# EAGLE board i2cRelay (EAGLE 9.2.2)
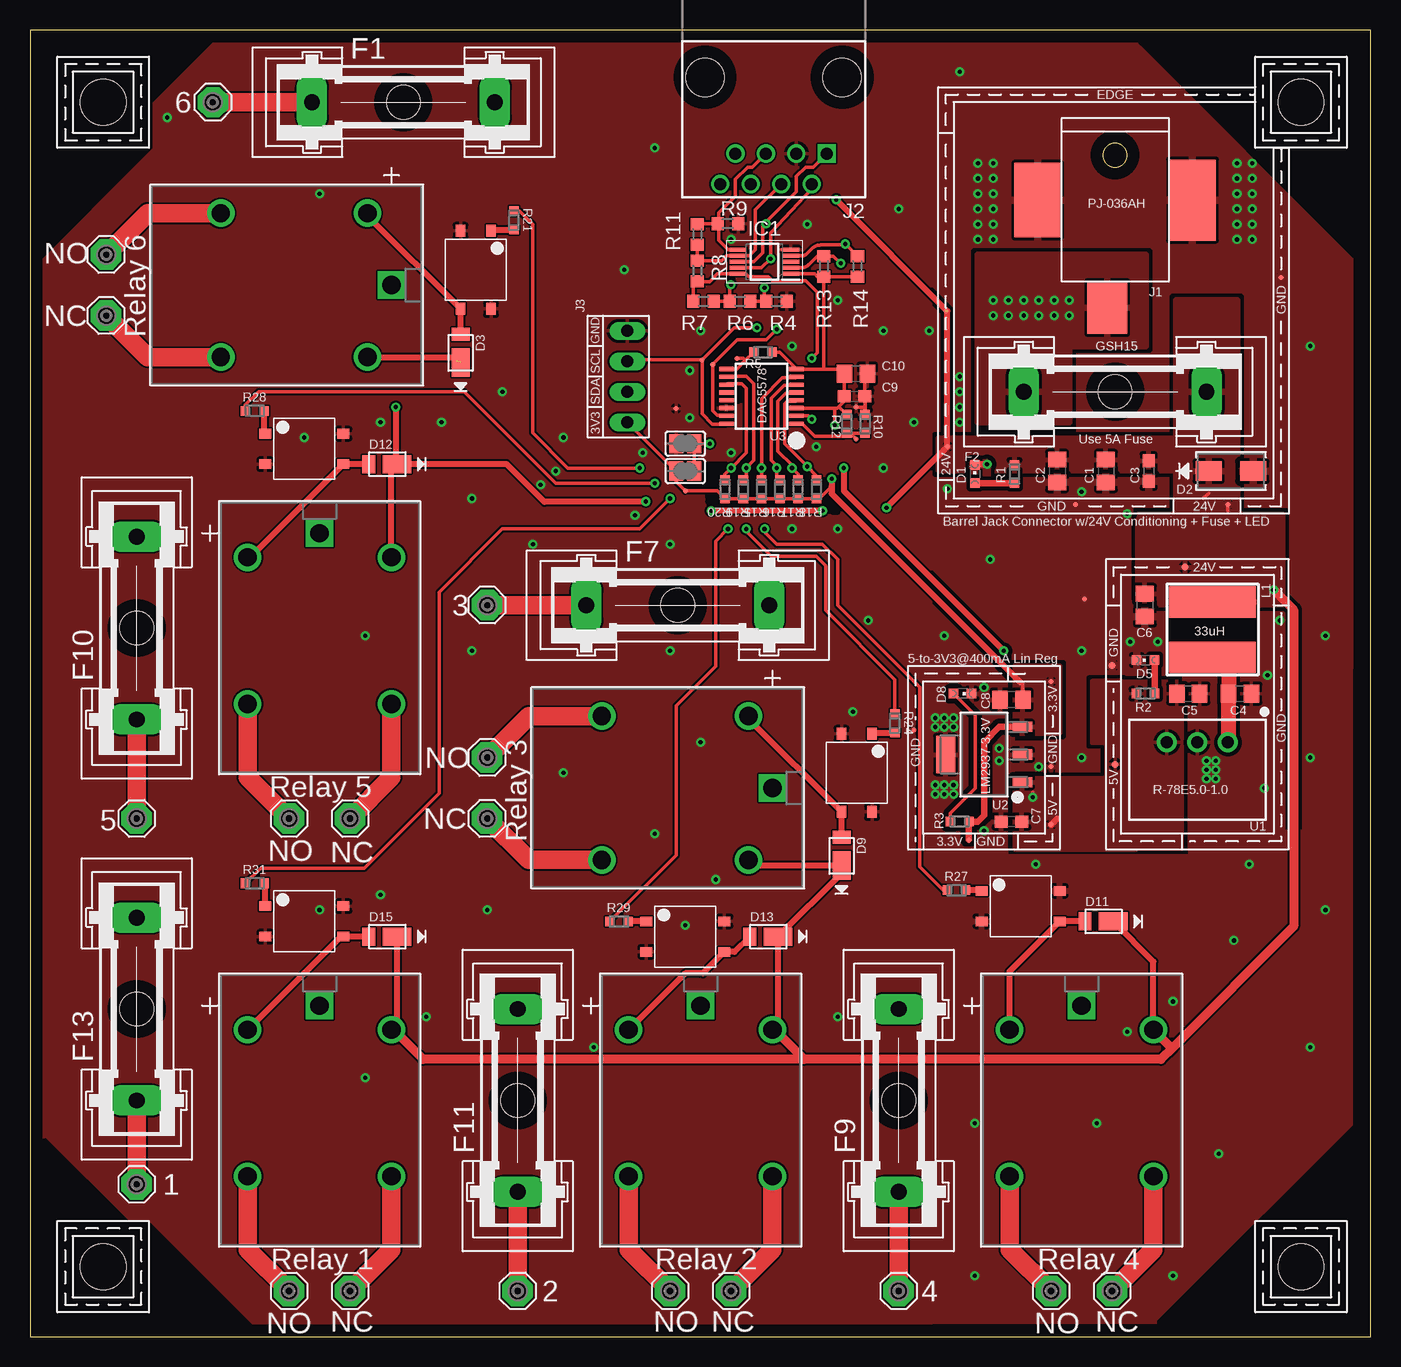
[diagram p0: board, top side]
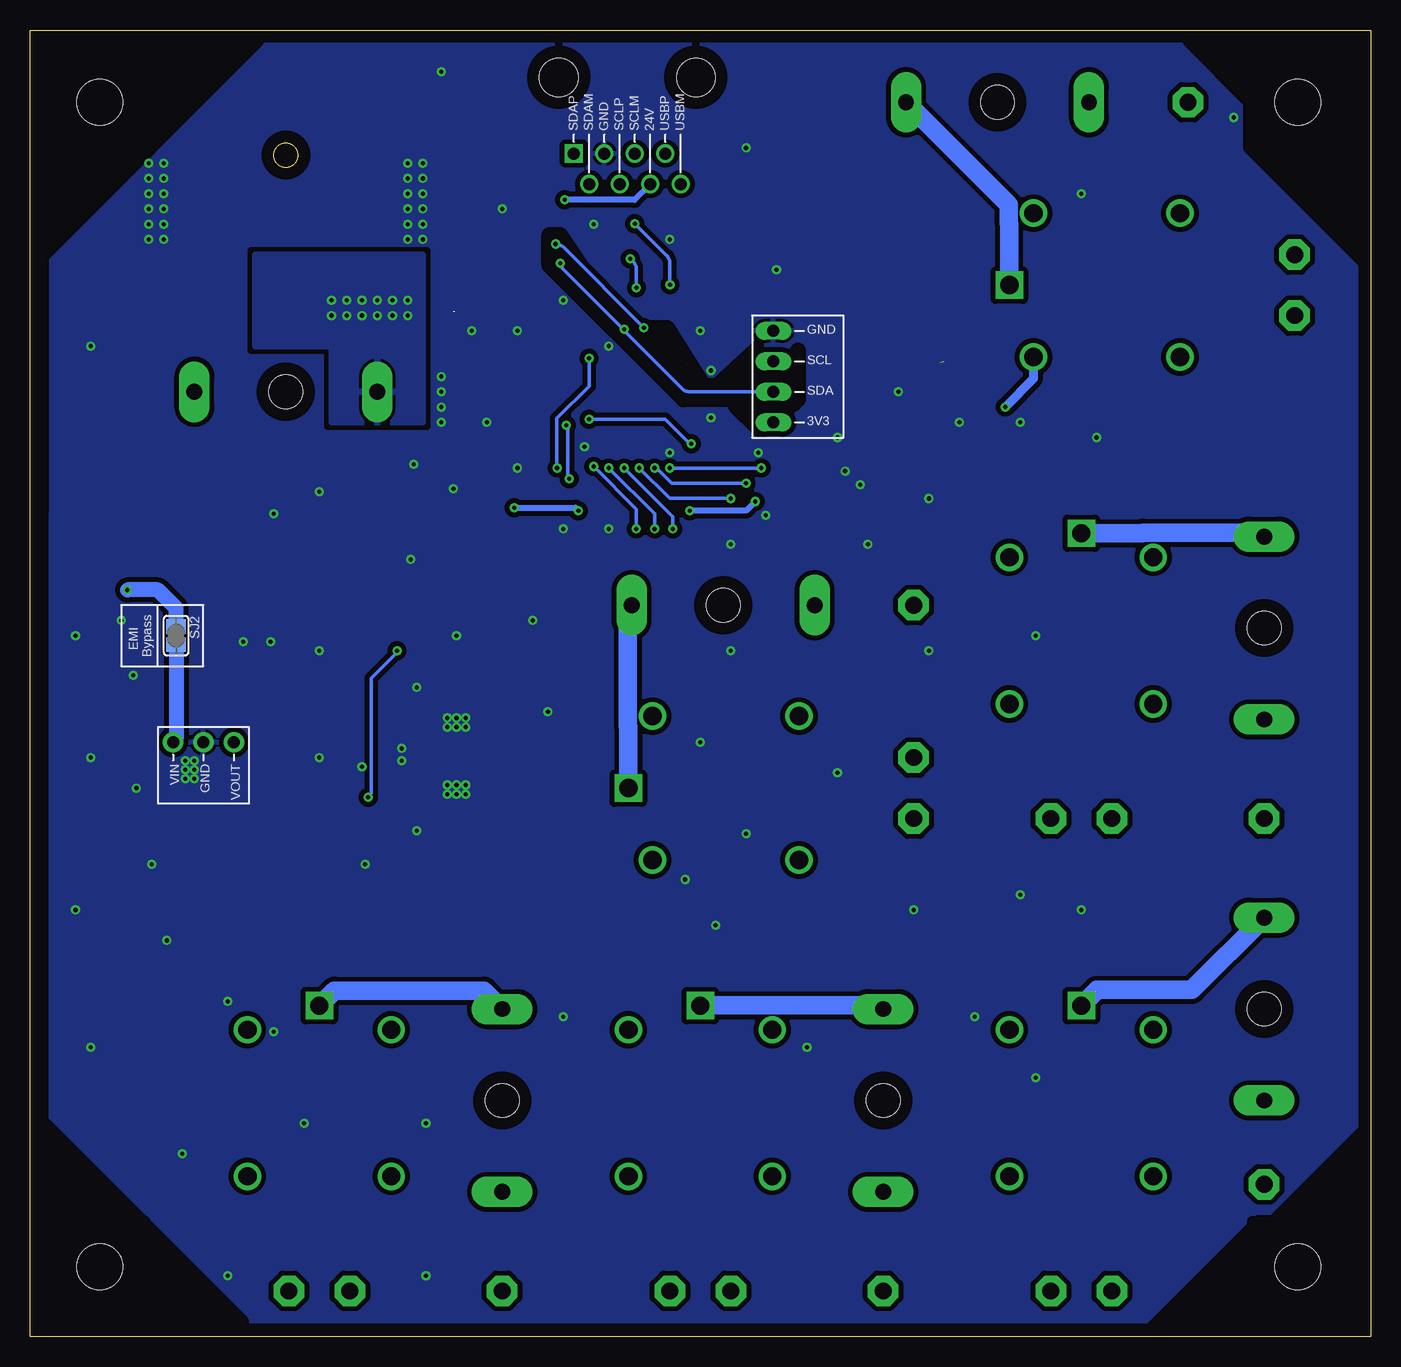
[diagram p1: board, bottom side, seen from below]

Size 111.74 x 108.89 mm. Coordinates in mm from the lower left corner, seen from the top.
Outline: 0,0 111.74,0 111.74,108.89 0,108.89 0,0
Copper layers (1*16): Top 0.035mm / dielectric 1.5mm / Bottom 0.035mm
Design rules "default": minimum track width 6mil, minimum drill 0.35mm, track to track 6mil, track to pad 6mil, pad to pad 6mil, via to via 6mil, smd to smd 6mil, copper to edge 40mil, drill to drill 6mil, minimum pad ring 10mil, minimum via ring 8mil, stop-mask expansion 4mil, vias tented up to drill 0mil, thermal gap 10mil
tRestrict: 16 lines
bRestrict: 23 lines

## Footprints (pad centres in the part's own frame; a part is rotated, then mirrored left to right if it is on the bottom)
C0805 = smd 1.3 x 1.5: 1 -0.95,0; 2 0.95,0
C0603 = smd 1.1 x 1: 1 -0.85,0; 2 0.85,0
CHIPLED_0603 = smd 0.8 x 0.8: A 0,-0.75; C 0,0.75
SMA = smd 2.18 x 1.63: 1 -1.857,0; 2 1.857,0
POWERDI123 = smd 1.05 x 1.5: + -1.3,0 | smd 2.4 x 1.5: - 1.05,0
GSH15 = drill 1.321 pad 2.54 long: 1 -7.62,0; 2 7.62,0 | hole 2.794: 0,0
SOP50P490X110-10N = smd 1.4 x 0.3: 1 -2.2,1; 2 -2.2,0.5; 3 -2.2,0; 4 -2.2,-0.5; 5 -2.2,-1; 6 2.2,-1; 7 2.2,-0.5; 8 2.2,0; 9 2.2,0.5; 10 2.2,1
BARREL-JACK-PJ-036AH = smd 4.4 x 3.3: 1 2.2,-0.65 | smd 6.75 x 3.9: 2 -6.75,6.45 | smd 6.2 x 3.9: 3 -6.75,-6.45
OPENAG-V1-RJ45 = drill 1: 24V(6) 1.905,8.89; DSCLM(5) 0.635,6.35; DSCLP(4) -0.635,8.89; DSDAM(2) -3.175,8.89; GND(3) -1.905,6.35; USBM(8) 4.445,8.89; USBP(7) 3.175,6.35 | drill 1 square: DSDAP(1) -4.445,6.35 | hole 3.2: -5.715,0; 5.715,0
HEADER-I2C = drill 1 long: 3V3 3.81,0.762; GND -3.81,0.762; SCL -1.27,0.762; SDA 1.27,0.762
29333C = smd 2.6 x 7.2: 1 -2.3,0; 2 2.3,0
SE14 = drill 1.397 pad 2.54 octagon: MP 0,0
RC0603N = smd 0.756 x 0.8: 1 -0.778,0; 2 0.778,0
R0603 = smd 1 x 1.1: 1 -0.85,0; 2 0.85,0
RELAY_G5LE-1 = drill 1.524 pad 2.032 square: 1 0,17.424 | drill 1.524 pad 2.032: 2 -5.994,15.418; 3 -5.994,3.2; 4 5.994,3.2; 5 5.994,15.418
EMI-BYPASS = smd 1.168 x 1.6: 1 -0.762,0.254; 2 0.762,0.254
SJ1 = smd 1.168 x 1.6: 1 -0.762,0; 2 0.762,0
TP04R = smd 0.4 x 0.4: 1 0,0
TP06R = smd 0.6 x 0.6: TP 0,0
R-78E5.0-1.0 = drill 1 pad 1.676: 1 -2.54,0; 2 0,0; 3 2.54,0
MP04A = smd 1.6 x 0.838: 1 -3.2,2.3; 2 -3.2,0; 3 -3.2,-2.3 | smd 1.6 x 3.099: 4 3.2,0
TSSOP16 = smd 0.35 x 1.2: 1 -2.275,-2.925; 2 -1.625,-2.925; 3 -0.975,-2.925; 4 -0.325,-2.925; 5 0.325,-2.925; 6 0.975,-2.925; 7 1.625,-2.925; 8 2.275,-2.925; 9 2.275,2.925; 10 1.625,2.925; 11 0.975,2.925; 12 0.325,2.925; 13 -0.325,2.925; 14 -0.975,2.925; 15 -1.625,2.925; 16 -2.275,2.925
CORNER = hole 3.81: 0,0
LTV-355T = smd 0.8 x 1: N1 -1.27,-3.25; N2 1.27,-3.25; N3 -1.27,3.25; N4 1.27,3.25

## Placement (x,y rotation side)
C1  10uF  [C0805]  89.66,72.14 270 top
C2  4.7uF  [C0805]  85.6,72.14 270 top
C3  0.1uF  [C0603]  93.22,72.14 270 top
C4  10uF  [C0805]  100.84,53.59 0 top
C5  10uF  [C0805]  96.52,53.59 0 top
C6  10uF  [C0805]  92.9,60.96 270 top
C7  0.1uF  [C0603]  81.79,42.93 180 top
C8  10uF  [C0805]  81.79,53.09 180 top
C9  0.1uF  [C0603]  68.71,78.36 0 top
C10  4.7uF  [C0805]  68.83,80.26 0 top
D1  APT1608  [CHIPLED_0603]  78.74,71.88 0 top
D2  SMAJ26A  [SMA]  100.08,72.14 0 top
D3  SBR2A40P1-7  [POWERDI123]  35.88,82.23 270 top
D5  APT1608  [CHIPLED_0603]  92.96,56.39 90 top
D8  APT1608  [CHIPLED_0603]  77.72,53.59 270 top
D9  SBR2A40P1-7  [POWERDI123]  67.63,40.32 270 top
D11  SBR2A40P1-7  [POWERDI123]  89.22,34.61 0 top
D12  SBR2A40P1-7  [POWERDI123]  29.53,72.71 0 top
D13  SBR2A40P1-7  [POWERDI123]  61.28,33.34 0 top
D15  SBR2A40P1-7  [POWERDI123]  29.53,33.34 0 top
F1  [GSH15]  31.12,102.87 0 top
F2  GSH15  [GSH15]  90.42,78.74 0 top
F4  Use 5A Fuse  [FUSE-CARTRIDGE]  87.38,74.42 0 top
F7  [GSH15]  53.98,60.96 0 top
F9  [GSH15]  72.39,19.69 90 top
F10  [GSH15]  8.89,59.05 90 top
F11  [GSH15]  40.64,19.69 90 top
F13  [GSH15]  8.89,27.3 90 top
IC1  PCA9615DP  [SOP50P490X110-10N]  61.2,89.58 180 top
J1  PJ-036AH  [BARREL-JACK-PJ-036AH]  90.42,87.96 270 top
J2  54602-908LF  [OPENAG-V1-RJ45]  61.97,104.95 180 top
J3  I2C-HEADER  [HEADER-I2C]  49.02,80.01 270 top
L1  33uH  [29333C]  98.55,58.93 270 top
LSP4  SE14  [SE14]  15.24,102.87 270 top
LSP5  SE14  [SE14]  6.35,90.17 270 top
LSP6  SE14  [SE14]  6.35,85.09 270 top
LSP13  SE14  [SE14]  38.1,60.96 270 top
LSP14  SE14  [SE14]  38.1,48.26 270 top
LSP15  SE14  [SE14]  38.1,43.18 270 top
LSP19  SE14  [SE14]  72.39,3.81 0 top
LSP20  SE14  [SE14]  85.09,3.81 0 top
LSP21  SE14  [SE14]  90.17,3.81 0 top
LSP22  SE14  [SE14]  8.89,43.18 0 top
LSP23  SE14  [SE14]  21.59,43.18 0 top
LSP24  SE14  [SE14]  26.67,43.18 0 top
LSP25  SE14  [SE14]  40.64,3.81 0 top
LSP26  SE14  [SE14]  53.34,3.81 0 top
LSP27  SE14  [SE14]  58.42,3.81 0 top
LSP31  SE14  [SE14]  8.89,12.7 0 top
LSP32  SE14  [SE14]  21.59,3.81 0 top
LSP33  SE14  [SE14]  26.67,3.81 0 top
R1  1K  [RC0603N]  82.04,71.88 90 top
R2  100  [RC0603N]  92.96,53.59 180 top
R3  100  [RC0603N]  77.47,42.93 0 top
R4  600  [R0603]  62.22,86.28 0 top
R5  1K  [RC0603N]  61.09,82.04 180 top
R6  120  [R0603]  59.17,86.28 0 top
R7  600  [R0603]  56.12,86.28 0 top
R8  600  [R0603]  55.62,88.82 270 top
R9  600  [R0603]  58.16,92.75 180 top
R10  0 OHM  [RC0603N]  69.6,76.07 270 top
R11  120  [R0603]  55.62,91.86 270 top
R12  1K  [RC0603N]  68.07,76.07 270 top
R13  10K  [R0603]  66.16,89.2 270 top
R14  10K  [R0603]  68.95,89.2 270 top
R15  1K  [RC0603N]  60.96,70.61 270 top
R16  1K  [RC0603N]  62.48,70.61 270 top
R17  1K  [RC0603N]  64.01,70.61 270 top
R18  1K  [RC0603N]  65.53,70.61 270 top
R19  1K  [RC0603N]  59.44,70.61 270 top
R20  1K  [RC0603N]  57.91,70.61 270 top
R21  100  [RC0603N]  40.32,93.03 270 top
R24  100  [RC0603N]  72.07,51.12 270 top
R27  100  [RC0603N]  77.22,37.21 0 top
R28  100  [RC0603N]  18.73,77.15 0 top
R29  100  [RC0603N]  49.09,34.61 0 top
R31  100  [RC0603N]  18.73,37.78 0 top
RELAY_1  G5LE-14_DC12  [RELAY_G5LE-1]  12.7,87.63 270 top
RELAY_5  G5LE-14_DC12  [RELAY_G5LE-1]  44.45,45.72 270 top
RELAY_7  G5LE-14_DC12  [RELAY_G5LE-1]  87.63,10.16 0 top
RELAY_8  G5LE-14_DC12  [RELAY_G5LE-1]  24.13,49.53 0 top
RELAY_9  G5LE-14_DC12  [RELAY_G5LE-1]  55.88,10.16 0 top
RELAY_11  G5LE-14_DC12  [RELAY_G5LE-1]  24.13,10.16 0 top
SJ2  [EMI-BYPASS]  99.82,58.42 270 bottom
SJ_A1  [SJ1]  54.61,72.14 0 top
SJ_A2  [SJ1]  54.61,74.42 0 top
TP3  TPTP04R  [TP04R]  99.82,69.34 0 top
TP4  TPTP04R  [TP04R]  87.12,69.34 0 top
TP5  TPTP04R  [TP04R]  104.27,88.27 0 top
TP6  TPTP04R  [TP04R]  76.45,74.17 0 top
TP7  TPTP06R  [TP06R]  90.42,47.69 180 top
TP8  TPTP06R  [TP06R]  96.27,64.13 180 top
TP9  TPTP06R  [TP06R]  90.17,55.94 180 top
TP10  TPTP04R  [TP04R]  78.23,41.4 90 top
TP11  TPTP04R  [TP04R]  85.09,42.67 90 top
TP12  TPTP04R  [TP04R]  73.66,50.55 90 top
TP13  TPTP04R  [TP04R]  85.09,54.61 90 top
TP14  TPTP04R  [TP04R]  85.09,47.5 90 top
TP21  TPTP04R  [TP04R]  76.33,85.47 270 top
TP22  TPTP04R  [TP04R]  54.61,70.48 270 top
TP23  TPTP04R  [TP04R]  68.83,77.47 90 top
TP24  TPTP04R  [TP04R]  56.9,81.03 270 top
TP25  TPTP04R  [TP04R]  56.01,81.41 270 top
TP26  TPTP04R  [TP04R]  68.83,74.8 270 top
TP27  TPTP04R  [TP04R]  58.93,81.53 270 top
TP28  TPTP04R  [TP04R]  53.85,77.34 180 top
TP29  TPTP04R  [TP04R]  87.88,61.47 0 top
U1  R-78E5.0-1.0  [R-78E5.0-1.0]  97.28,49.53 180 top
U2  LM2937-3.3V  [MP04A]  79.5,48.51 180 top
U3  DAC5578  [TSSOP16]  60.96,78.36 90 top
U$1  [CORNER]  105.92,102.87 180 top
U$2  [CORNER]  6.1,102.87 270 top
U$3  LTV-355T  [LTV-355T]  37.15,88.9 180 top
U$4  [CORNER]  6.1,5.84 0 top
U$5  [CORNER]  105.92,5.84 90 top
U$6  LTV-355T  [LTV-355T]  68.9,46.99 180 top
U$8  LTV-355T  [LTV-355T]  82.55,35.88 270 top
U$9  LTV-355T  [LTV-355T]  22.86,73.98 270 top
U$10  LTV-355T  [LTV-355T]  54.61,33.34 270 top
U$12  LTV-355T  [LTV-355T]  22.86,34.61 270 top

## Library data of the parts
C1 C4-C6 C8 = openag-capacitors; MANUFACTURER: Taiyo Yuden; MPN: GMK212BBJ106KG-T; VENDOR: Digikey; VLINK: https://www.digikey.com/product-detail/en/taiyo-yuden/GMK212BBJ106KG-T/587-4893-1-ND/6563736; VPN: 587-4893-1-ND
C2 C10 = openag-capacitors; MANUFACTURER: Samsung; MPN: CL21A475KBQNNNE; VENDOR: Digikey; VLINK: https://www.digikey.com/product-detail/en/samsung-electro-mechanics/CL21A475KBQNNNE/1276-1248-1-ND/3889334; VPN: 1276-1248-1-ND
C3 C7 C9 = openag-capacitors; MANUFACTURER: Kemet; MPN: C0603C104K5RACTU; VENDOR: Digikey; VLINK: https://www.digikey.com/product-detail/en/kemet/C0603C104K5RACTU/399-5089-1-ND/1465623; VPN: 399-5089-1-ND
D1 D5 D8 = openag-diodes; MANUFACTURER: Kingbright; MPN: APT1608CGCK; VENDOR: Digikey; VLINK: https://www.digikey.com/product-detail/en/kingbright/APT1608CGCK/754-1116-1-ND/1747833#; VPN: 754-1116-1-ND
D2 = openag-diodes; MANUFACTURER: Diodes Incorporated; MPN: SMAJ26A-13-F; VENDOR: Digikey; VLINK: https://www.digikey.com/product-detail/en/diodes-incorporated/SMAJ26A-13-F/SMAJ26A-FDICT-ND/806583; VPN: SMAJ26A-FDICT-ND
D3 D9 D11-D13 D15 = openag-diodes; MANUFACTURER: Diodes Incorporated; MPN: SBR2A40P1-7; VENDOR: Digikey; VLINK: https://www.digikey.com/product-detail/en/diodes-incorporated/SBR2A40P1-7/SBR2A40P1DITR-ND/1681825; VPN: SBR2A40P1DITR-ND
F1 F7 F9-F11 F13 = fuse; MPN: 64900001039; OC_FARNELL: 1271673; OC_NEWARK: 02P0318
F2 = openag-fuses; MANUFACTURER: Littelfuse Inc.; MPN: 64900001039; VENDOR: Digikey; VLINK: https://www.digikey.com/product-detail/en/littelfuse-inc/64900001039/WK0011-ND/245470; VPN: WK0011-ND
F4 = openag-fuses; MANUFACTURER: Littelfuse Inc.; MPN: 0217005.MXP; VENDOR: Digikey; VLINK: https://www.digikey.com/product-detail/en/littelfuse-inc/0217005.MXP/F1725-ND/777549; VPN: F1725-ND
IC1 = PCA9615DP; DESCRIPTION: Buffer, ReDriver 2 Channel 400kHz 10-TSSOP; HEIGHT: 1.1mm; MANUFACTURER_NAME: Nexperia; MANUFACTURER_PART_NUMBER: PCA9615DP; SUPPLIER_NAME: RS
J1 = openag-connectors; MANUFACTURER: CUI Inc.; MPN: PJ-036AH-SMT-TR; VENDOR: Digikey; VLINK: https://www.digikey.com/product-detail/en/cui-inc/PJ-036AH-SMT-TR/CP-036AHPJCT-ND/1530994; VPN: CP-036AHPJCT-ND
J2 = openag_connector; POPULATE: YES; VERIFIED: NO
J3 SJ2 SJ_A1 SJ_A2 = openag-connectors; MPN: N/A
L1 = openag-inductors; MANUFACTURER: Murata Power Solutions Inc.; MPN: 29333C; VENDOR: Digikey; VLINK: https://www.digikey.com/product-detail/en/murata-power-solutions-inc/29333C/811-1138-1-ND/1924860; VPN: 811-1138-1-ND
LSP4-LSP6 LSP13-LSP15 LSP19-LSP27 LSP31-LSP33 = solpad
R1 R5 R12 R15-R20 = openag-resistors; MANUFACTURER: Panasonic; MPN: P20283CT-ND; VENDOR: Digikey; VLINK: https://www.digikey.com/product-detail/en/panasonic-electronic-components/ERJ-PB3D1001V/P20283CT-ND/6214538; VPN: P20283CT-ND
R2 R3 R21 R24 R27-R29 R31 = openag-resistors; MANUFACTURER: Yageo; MPN: RC0603JR-07100RL; VENDOR: Digikey; VLINK: https://www.digikey.com/product-detail/en/yageo/RC0603JR-07100RL/311-100GRCT-ND/729644; VPN: 311-100GRCT-ND
R4 R6-R9 R11 R13 R14 = rcl
R10 = openag-resistors; MANUFACTURER: Yageo; MPN: RC0603JR-070RL; VENDOR: Digikey; VLINK: https://www.digikey.com/product-detail/en/yageo/RC0603JR-070RL/311-0.0GRCT-ND/729622; VPN: 311-0.0GRCT-ND
RELAY_1 RELAY_5 RELAY_7-RELAY_9 RELAY_11 = relay_2; MANUFACTURER_PART_NUMBER: G5LE14 DC12; VENDOR: OMRON
TP3-TP14 TP21-TP29 = openag-testpads; MPN: N/A
U1 = openag-regulators; MANUFACTURER: Recom Power; MPN: R-78E5.0-1.0; VENDOR: Digikey; VLINK: https://www.digikey.com/product-detail/en/recom-power/R-78E5.0-1.0/945-2201-ND/4930585; VPN: 945-2201-ND
U2 = openag-regulators; MANUFACTURER: Texas Instruments; MPN: LM2937IMP-3.3/NOPB; VENDOR: Digikey; VLINK: https://www.digikey.com/product-detail/en/texas-instruments/LM2937IMP-3.3-NOPB/LM2937IMP-3.3-NOPBCT-ND/270742#; VPN: LM2937IMP-3.3/NOPBCT-ND
U3 = openag-dacs; MANUFACTURER: Texas Instruments; MPN: DAC5578SPW; VENDOR: Digikey; VLINK: https://www.digikey.com/product-detail/en/texas-instruments/DAC5578SPW/296-27736-5-ND/2360827; VPN: 296-27736-5-ND
U$1 U$2 U$4 U$5 = openag-frames
U$3 U$6 U$8-U$10 U$12 = openag-transistors

## Nets
24V_EMI: C4.1 L1.2 SJ2.2 U1.1
24V_IN1: F2.1 J1.1
!LDAC!: R10.2 R12.2 TP26.1 U3.1
+3V3: C8.1 C9.1 C10.1 IC1.1 J3.3V3 R3.2 R5.1 R12.1 R13.2 R14.2 R15.2 R16.2 R17.2 R18.2 R19.2 R20.2 SJ_A1.1 TP10.1 TP13.1 TP22.1 U2.3 U3.3 U3.8
+5V: C5.1 C7.1 IC1.10 R2.2 R7.1 R8.2 TP7.TP TP11.1 U1.3 U2.1
+24V: C1.1 C2.1 C3.1 C6.1 D2.1 D3.- D9.- D11.- D12.- D13.- D15.- F2.2 J2.24V(6) L1.1 R1.2 RELAY_1.5 RELAY_5.5 RELAY_7.5 RELAY_8.5 RELAY_9.5 RELAY_11.5 SJ2.1 TP3.1 TP6.1 TP8.TP TP21.1
ADDR0: SJ_A1.2 SJ_A2.2 U3.2
DAC_!CLR!: R5.2 TP27.1 U3.9
DIM1: R15.1 R31.1 U3.7
DIM2: R16.1 R29.1 U3.6
DIM3: R17.1 R24.1 U3.5
DIM4: R18.1 R27.1 U3.4
DIM5: R19.1 R28.1 U3.10
DIM6: R20.1 R21.1 U3.11
DSCLM1: IC1.6 J2.DSCLM(5) R9.2 R11.1
DSCLP1: IC1.7 J2.DSCLP(4) R8.1 R11.2
DSDAM1: IC1.9 J2.DSDAM(2) R4.1 R6.2
DSDAP1: IC1.8 J2.DSDAP(1) R6.1 R7.2
GND: C1.2 C2.2 C3.2 C4.2 C5.2 C6.2 C7.2 C8.2 C9.2 C10.2 D1.C D2.2 D5.C D8.C IC1.5 J1.2 J1.3 J2.GND(3) J3.GND R4.2 R9.1 R10.1 SJ_A2.1 TP4.1 TP5.1 TP9.TP TP12.1 TP14.1 TP23.1 TP28.1 TP29.1 U1.2 U2.2 U2.4 U3.14 U$3.N2 U$3.N3 U$6.N2 U$6.N3 U$8.N2 U$8.N3 U$9.N2 U$9.N3 U$10.N2 U$10.N3 U$12.N2 U$12.N3
N$1: D1.A R1.1
N$3: D5.A R2.1
N$5: D3.+ RELAY_1.2 U$3.N4
N$6: D8.A R3.1
N$7: F1.2 RELAY_1.1
N$11: LSP5.MP RELAY_1.3
N$13: R21.2 U$3.N1
N$14: LSP6.MP RELAY_1.4
N$15: F1.1 LSP4.MP
N$28: D9.+ RELAY_5.2 U$6.N4
N$29: F7.2 RELAY_5.1
N$30: LSP14.MP RELAY_5.3
N$31: R24.2 U$6.N1
N$32: LSP15.MP RELAY_5.4
N$33: F7.1 LSP13.MP
N$40: D11.+ RELAY_7.2 U$8.N4
N$41: F9.2 RELAY_7.1
N$42: LSP20.MP RELAY_7.3
N$43: R27.2 U$8.N1
N$44: LSP21.MP RELAY_7.4
N$45: F9.1 LSP19.MP
N$46: D12.+ RELAY_8.2 U$9.N4
N$47: F10.2 RELAY_8.1
N$48: LSP23.MP RELAY_8.3
N$49: R28.2 U$9.N1
N$50: LSP24.MP RELAY_8.4
N$51: F10.1 LSP22.MP
N$52: D13.+ RELAY_9.2 U$10.N4
N$53: F11.2 RELAY_9.1
N$54: LSP26.MP RELAY_9.3
N$55: R29.2 U$10.N1
N$56: LSP27.MP RELAY_9.4
N$57: F11.1 LSP25.MP
N$64: D15.+ RELAY_11.2 U$12.N4
N$65: F13.2 RELAY_11.1
N$66: LSP32.MP RELAY_11.3
N$67: R31.2 U$12.N1
N$68: LSP33.MP RELAY_11.4
N$69: F13.1 LSP31.MP
SCL: IC1.4 J3.SCL R14.1 TP25.1 U3.16
SDA: IC1.2 J3.SDA R13.1 TP24.1 U3.15
USBM1: J2.USBM(8)
USBP1: J2.USBP(7)

## Tracks (layer width: path | path; a pad name or v marks a point on that pad's centre or on a via)
24V_EMI
  Top 1.27: U1.1 99.89,49.6 C4.1 99.89,55.29 arc90 L1.2
  Bottom 1.27: SJ2.2 99.57,49.78 U1.1
24V_IN1  (via drill 0.35)
  other vias: 86.61,86.36 86.61,85.09 85.34,86.36 85.34,85.09 84.07,86.36 84.07,85.09 82.8,86.36 81.53,86.36 81.53,85.09 82.8,85.09 80.26,85.09 80.26,86.36
  pour Bottom (isolate 0.406): 86.61,76.2 78.99,76.2 78.99,90.17 92.96,90.17 92.96,82.55 86.61,82.55
  pour Top (isolate 0.406): 78.99,76.2 86.61,76.2 86.61,82.55 92.96,82.55 92.96,90.17 78.99,90.17
!LDAC!
  Top 0.305: U3.1 64.36,76.08 65.41,75.04 67.82,75.04 R12.2 68.58,75.3 | R10.2 68.58,75.3 | TP26.1 68.58,75.06 68.58,75.3
+3V3  (via drill 0.35)
  Top 0.305: IC1.1 65.38,88.58 65.61,88.35 R13.2 | R13.2 R14.2 | R5.1 62.48,82.04 U3.8 66.04,80.63 | 67.41,77.51 R12.1 | 67.41,77.51 67.28,77.38 67.06,77.38 | 67.41,77.51 67.86,77.96 C9.1 67.86,80.24 C10.1 67.51,80.63 66.04,80.63 | U3.3 67.06,77.38 | J3.3V3 SJ_A1.1 53.85,71.25 TP22.1 57.26,70.48 R20.2 R19.2 R15.2 R16.2 R17.2 R18.2 65.77,69.83 66.8,70.87 | R13.2 66.16,80.75 66.04,80.63 | v67.06,75.95 67.06,77.38 | C8.1 82.74,54.42
  Top 0.508: 82.55,54.5 66.8,70.25 66.8,70.87 v66.8,71.5
  Top 0.559: TP10.1 78.23,42.91 R3.2 78.99,42.93 79.5,43.43 79.5,49.53 80.79,50.81 U2.3
  Bottom 0.305: v67.06,75.95 66.93,75.82 66.93,71.63 v66.8,71.5
  pour Top (isolate 0.305): 85.85,55.88 82.04,55.88 82.04,50.29 85.85,50.29
+5V  (via drill 0.35)
  Top 0.305: 83.57,45.35 v83.57,44.96 | 55.66,87.93 56.63,87.93 57.28,88.58 IC1.10 59.64,88.58 59.89,88.32 61.54,88.32 61.85,88.01 64.64,88.01 65.6,87.06 65.6,81.98 v65.15,81.53 | 55.66,87.93 R8.2 | 55.66,87.93 55.27,87.55 R7.1 55.15,86.4
  Top 0.508: v67.82,72.39 67.82,70.48 v81.15,57.15
  Top 0.559: TP11.1 85.6,43.18
  Bottom 0.305: v81.15,57.15 81.15,57.02 83.29,54.89 83.29,45.27 83.57,44.99 v83.57,44.96 | v67.82,72.39 67.84,72.41 67.84,76.53 65.15,79.22 v65.15,81.53
  pour Top (isolate 0.305): 89.66,40.64 89.66,54.61 96.01,54.61 96.01,40.64
  pour Top (isolate 0.406): 90.93,54.61 88.52,54.61 88.52,49.53 90.93,49.53
  pour Top (isolate 0.305): 85.85,40.64 85.85,46.48 82.04,46.48 82.04,40.64
  pour Top (isolate 0.406): 92.2,46.48 84.58,46.48 84.58,40.64 92.2,40.64
+24V  (via drill 0.35)  (2 unrouted)
  Top 0.305: TP3.1 99.82,68.83 | 98.22,70.28 97.79,69.85
  Top 0.508: v67.18,94.74 76.45,85.47 TP6.1 v71.37,69.09 | RELAY_7.5 93.62,31.25 D11.- | RELAY_9.5 62.33,26.03 D13.- 67.63,38.64 D9.- 59.87,39.27 RELAY_5.5 | RELAY_8.5 30.12,72.25 30.48,72.61 | 30.48,72.61 D12.- 39.72,72.71 42.85,69.57 51.29,69.57 v51.31,69.6 | RELAY_1.5 35.2,81.64 35.56,81.28 | D15.- 30.58,26.03 30.21,25.67 RELAY_11.5 | v30.48,77.47 30.48,72.61 | v66.04,68.83 v56.77,68.83
  Top 0.762: v103.63,62.23 103.65,62.23 105.31,60.58 105.31,34.19 95.25,24.13 | 95.25,24.13 94.23,23.11 64.52,23.11 | 64.52,23.11 32.77,23.11 30.21,25.67 | RELAY_9.5 62.05,25.58 64.52,23.11 | RELAY_7.5 95.07,24.13 95.25,24.13
  Bottom 0.508: J2.24V(6) 61.37,94.74 v67.18,94.74 | v71.37,69.09 66.29,69.09 v66.04,68.83 | v56.77,68.83 52.07,68.83 v51.31,69.6
  Bottom 0.762: RELAY_1.5 28.12,79.83 v30.48,77.47
  Bottom 1.27: SJ2.1 99.57,60.71 101.09,62.23 v103.63,62.23
  pour Top (isolate 0.406): 100.58,68.58 100.58,86.36 95.5,86.36 95.5,68.58
  pour Top (isolate 0.406): 96.01,74.93 96.01,72.14 75.69,72.14 75.69,74.93
  pour Top (isolate 0.406): 92.33,60.96 92.33,68.58 104.39,68.58 104.39,60.96
ADDR0  (via drill 0.35)
  Top 0.305: SJ_A1.2 SJ_A2.2 v56.64,74.42 | U3.2 64.87,76.73 v65.15,76.45
  Bottom 0.305: v65.15,76.45 58.8,76.45 56.77,74.42 v56.64,74.42
DAC_!CLR!
  Top 0.305: R5.2 59.62,81.35 | 59.62,81.35 58.9,80.63 U3.9 | TP27.1 59.44,81.53 59.62,81.35
DIM1  (via drill 0.35)
  Top 0.305: R15.1 v60.96,72.39 60.96,78.18 62.7,79.92 63.82,79.92 U3.7 | R31.1 19.23,39.05 27.86,39.05 34.11,45.3 34.11,62.05 39.37,67.31 50.8,67.31 v53.34,69.85
  Bottom 0.305: v60.96,72.39 58.42,69.85 v53.34,69.85
DIM2  (via drill 0.35)
  Top 0.305: R16.1 62.23,71.64 v62.23,72.39 62.23,72.59 61.76,73.06 61.76,78.19 62.84,79.27 63.82,79.27 U3.6 | v58.17,67.31 57.15,66.29 57.15,55.88 53.84,52.57 53.84,40.14 R29.1
  Bottom 0.305: v62.23,72.39 58.17,68.33 v58.17,67.31
DIM3  (via drill 0.35)
  Top 0.305: R17.1 64.01,71.88 v63.5,72.39 63.5,72.62 62.32,73.8 62.32,77.96 62.98,78.61 63.82,78.61 U3.5 | R24.1 72.06,54.75 66.29,60.52 66.29,64.26 65.53,65.02 61.79,65.02 59.69,67.12 v59.69,67.31
  Bottom 0.305: v63.5,72.39 59.69,68.58 v59.69,67.31
DIM4  (via drill 0.35)
  Top 0.305: R18.1 65.53,71.75 v64.77,72.52 62.88,74.41 62.88,77.73 63.12,77.97 63.82,77.97 U3.4 | R27.1 76.12,37.21 74.16,39.16 74.16,54.11 73.66,54.61 67.31,60.96 67.31,64.77 66.04,66.04 62.23,66.04 61.21,67.06 v61.21,67.31
  Bottom 0.305: v64.77,72.52 61.21,68.96 v61.21,67.31
DIM5  (via drill 0.35)
  Top 0.305: R19.1 59.69,71.64 v59.69,72.39 60.32,73.03 60.32,79.42 59.71,80.04 58.09,80.04 U3.10 | v52.07,71.12 43.8,71.12 36.18,78.74 19.05,78.74 17.96,77.64 R28.1
  Bottom 0.305: v59.69,72.39 59.53,72.39 58.26,71.12 v52.07,71.12
DIM6  (via drill 0.35)
  Top 0.305: R20.1 57.91,71.88 v58.42,72.39 59.68,73.65 59.68,79.03 59.31,79.39 58.09,79.39 U3.11 | v50.8,72.39 44.83,72.39 41.91,75.31 41.91,92.71 40.82,93.81 R21.1
  Bottom 0.305: v58.42,72.39 v50.8,72.39
DSCLM1
  Top 0.305: R11.1 55.66,92.75 R9.2 57.39,92.75 | IC1.6 58.17,90.58 57.39,91.36 57.39,92.75 | 57.39,92.75 57.39,93.64 58.79,95.04 58.79,96.44 59.81,97.45 60.19,97.45 J2.DSCLM(5)
DSCLP1
  Top 0.305: R11.2 R8.1 57.63,89.67 58.04,90.08 IC1.7 59.93,90.08 60.44,90.59 60.44,93.9 J2.DSCLP(4)
DSDAM1  (via drill 0.35)
  Top 0.305: J2.DSDAM(2) 65.14,95.67 61.71,91.99 v61.71,89.83 60.95,89.07 59.01,89.07 IC1.9 | R6.2 R4.1 arc-90 61.2,86.44 v61.2,87.42 61.2,87.55
  Bottom 0.305: v61.71,89.83 61.5,89.62 arc45 61.2,88.9 v61.2,87.42
DSDAP1  (via drill 0.35)
  Top 0.305: R7.2 R6.1 58.32,87.58 v58.41,87.67 | 61.33,92.88 61.08,92.63 61.08,90.34 60.32,89.58 IC1.8 | 61.33,92.88 63.87,95.42 63.87,96.69 64.63,97.45 65.27,97.45 J2.DSDAP(1) | v61.33,92.75 61.33,92.88
  Bottom 0.305: v58.41,87.67 58.41,89.41 arc-45 58.71,90.13 v61.33,92.75
GND  (via drill 0.35)
  Top 0.305: R10.1 69.6,77.47 | 69.6,77.47 69.6,78.32 C9.2 69.56,80.04 C10.2 | TP23.1 69.6,77.47 | IC1.5 62.64,90.58
  Top 0.559: D1.C 78.8,72.69 v79.76,72.69
  other vias: 80.26,97.79 80.26,96.52 80.26,95.25 80.26,93.98 80.26,92.71 80.26,91.44 78.99,91.44 78.99,92.71 78.99,93.98 78.99,95.25 78.99,96.52 78.99,97.79 100.58,97.79 100.58,96.52 100.58,95.25 100.58,93.98 100.58,92.71 100.58,91.44 101.85,91.44 101.85,92.71 101.85,93.98 101.85,95.25 101.85,96.52 101.85,97.79 87.63,70.41 76.45,70.66 93.98,57.91 103.12,55.12 98.04,48.01 98.04,47.24 98.81,47.24 98.81,48.01 98.04,46.48 98.81,46.48 91.69,57.91 76.2,45.97 76.96,45.97 76.2,45.21 76.96,45.21 75.44,45.97 75.44,45.21 76.96,50.8 76.96,51.56 76.2,50.8 75.44,50.8 76.2,51.56 75.44,51.56 80.77,48.01 79.5,54.1 80.77,49.02 79.5,42.16 84.07,47.5 87.63,57.15 87.63,48.26 77.47,80.01 77.47,78.74 77.47,77.47 77.47,76.2 72.39,93.98 71.12,83.82 71.12,72.39 65.53,74.17 73.66,76.2 58.42,91.44 64.77,92.71 55.88,83.82 54.99,80.52 63.5,82.55 63.5,67.31 67.31,67.31 78.74,17.78 78.74,5.08 95.25,5.08 99.06,15.24 88.9,17.78 106.68,24.13 107.95,35.56 106.68,48.26 107.95,58.42 101.6,39.37 100.33,33.02 104.14,59.69 49.53,88.9 52.07,99.06 74.93,83.82 36.83,69.85 34.29,76.2 39.37,78.74 44.45,74.93 41.91,66.04 53.34,66.04 24.13,95.25 44.45,46.99 29.21,36.83 24.13,35.56 83.82,39.37 102.87,45.72 80.01,64.77 91.44,68.58 68.58,52.07 69.85,59.69 76.2,58.42 22.86,74.93 29.21,76.2 53.34,57.15 55.88,49.53 54.61,34.29 27.94,58.42 36.83,57.15 52.07,41.91 57.15,38.1 38.1,35.56 46.99,24.13 67.31,26.67 91.44,25.4 95.25,27.94 27.94,21.59 33.02,26.67 77.47,105.41 106.68,82.55 42.55,70.99 43.82,72.14 51.05,73.66 67.31,86.36 58.42,73.66 11.43,101.6 50.42,68.45 54.99,76.58
  pour Top (isolate 0.305, rank 2): 72.52,55.75 72.52,107.57 109.98,107.57 109.98,55.75
  pour Bottom (isolate 0.406, rank 2): 0.76,107.95 109.98,107.95 109.98,68.58 0.76,68.58
  pour Top (isolate 0.305, rank 2): 84.58,40.64 84.58,68.58 110.11,68.58 110.11,40.64
  pour Bottom (isolate 0.406, rank 2): 109.98,1.27 109.98,68.58 0.76,68.58 0.76,1.27
  pour Top (isolate 0.406, rank 3): 73.15,40.64 85.85,40.64 85.85,60.96 73.15,60.96
  pour Bottom (isolate 0.406): 73.15,40.39 73.15,57.15 85.85,57.15 85.85,40.39
  pour Top: 0.76,107.95 75.06,107.95 75.06,0.89 0.76,0.89
  pour Top: 74.93,1.27 74.93,40.64 81.28,40.64 81.28,40 96.77,40 96.77,42.04 109.98,42.04 109.98,1.27
N$1
  Top 0.559: D1.A 78.77,71.1 R1.1
N$3
  Top 0.559: R2.1 93.74,56.36 D5.A
N$5
  Top 0.508: D3.+ U$3.N4 28.12,93.41 RELAY_1.2
N$6
  Top 0.305: D8.A 78.77,51.8 78.77,45.69 76.69,43.62 R3.1
N$7
  Bottom 1.524: RELAY_1.1 30.12,92.72 30.18,92.77 30.18,94.31 F1.2
N$11
  Top 1.524: LSP5.MP 9.8,93.62 RELAY_1.3
N$13
  Top 0.508: U$3.N1 38.52,92.25 R21.2
N$14
  Top 1.524: LSP6.MP 9.8,81.64 RELAY_1.4
N$15
  Top 1.524: F1.1 LSP4.MP
N$28
  Top 0.508: D9.+ U$6.N4 59.87,51.5 RELAY_5.2
N$29
  Bottom 1.524: RELAY_5.1 61.87,50.81 61.93,50.86 61.93,60.63 F7.2
N$30
  Top 1.524: LSP14.MP 41.55,51.71 RELAY_5.3
N$31
  Top 0.508: U$6.N1 70.27,50.34 R24.2
N$32
  Top 1.524: LSP15.MP 41.55,39.73 RELAY_5.4
N$33
  Top 1.524: F7.1 LSP13.MP
N$40
  Top 0.508: D11.+ U$8.N4 81.64,30.44 RELAY_7.2
N$41
  Bottom 1.524: RELAY_7.1 86.39,28.83 73.91,28.83 F9.2
N$42
  Top 1.524: LSP20.MP 81.64,7.26 RELAY_7.3
N$43
  Top 0.508: U$8.N1 79.24,37.21 R27.2
N$44
  Top 1.524: RELAY_7.4 93.62,7.26 LSP21.MP
N$45
  Top 1.524: F9.1 LSP19.MP
N$46
  Top 0.508: D12.+ U$9.N4 18.35,64.95 RELAY_8.2
N$47
  Bottom 1.524: RELAY_8.1 19.04,66.95 18.99,67 9.22,67 F10.2
N$48
  Top 1.524: LSP23.MP 18.14,46.63 RELAY_8.3
N$49
  Top 0.508: U$9.N1 19.51,75.35 R28.2
N$50
  Top 1.524: LSP24.MP 30.12,46.63 RELAY_8.4
N$51
  Top 1.524: F10.1 LSP22.MP
N$52
  Top 0.508: D13.+ 58.71,32.07 U$10.N4 56.08,30.28 54.59,30.28 RELAY_9.2
N$53
  Bottom 1.524: RELAY_9.1 55.88,27.64 40.97,27.64 F11.2
N$54
  Top 1.524: LSP26.MP 49.89,7.26 RELAY_9.3
N$55
  Top 0.508: U$10.N1 R29.2
N$56
  Top 1.524: RELAY_9.4 61.87,7.26 LSP27.MP
N$57
  Top 1.524: F11.1 LSP25.MP
N$64
  Top 0.508: D15.+ U$12.N4 25.9,33.34 RELAY_11.2
N$65
  Bottom 1.524: F13.2 14.91,28.91 22.86,28.91 22.86,28.85 RELAY_11.1
N$66
  Top 1.524: LSP32.MP 18.14,7.26 RELAY_11.3
N$67
  Top 0.508: U$12.N1 19.61,37.68 R31.2
N$68
  Top 1.524: RELAY_11.4 30.12,7.26 LSP33.MP
N$69
  Top 1.524: F13.1 LSP31.MP
SCL  (via drill 0.35)
  Top 0.305: U3.16 57.98,76.03 56.87,76.03 56.01,76.89 TP25.1 | TP25.1 58.67,84.07 v60.58,84.07 | J3.SCL 49.91,81.41 TP25.1 | 67.94,90.97 68.03,90.97 R14.1 | 67.94,90.97 v67.94,91.06 | 67.94,90.97 65.88,90.97 arc45 65.16,90.68 64.71,90.23 arc-45 64.35,90.08 IC1.4
  Bottom 0.305: v60.58,84.07 60.58,84.09 67.26,90.78 arc-45 v67.94,91.06
SDA  (via drill 0.35)  (1 unrouted)
  Top 0.305: U3.15 57.97,76.8 57.27,76.8 56.9,77.17 TP24.1 58.93,83.06 61.34,83.06 v62.23,83.95 | v67.55,89.45 66.96,90.05 R13.1 65.61,90.05 64.94,89.38 arc-45 64.22,89.08 IC1.2
  Bottom 0.305: J3.SDA 56.73,78.74 arc45 57.45,79.04 62.23,83.82 v62.23,83.95 62.3,83.95 67.37,89.02 arc45 v67.55,89.45

## Text on the board
tPlace: EDGE | 6 | Relay 6 | NO | GND | NC | 24V | GND | 24V | Barrel Jack Connector w/24V Conditioning + Fuse + LED | 24V | 3 | GND | 5-to-3V3@400mA Lin Reg | 3.3V | Relay 3 | GND | GND | GND | NO | 5V | Relay 5 | 5V | 5 | NC | 3.3V | GND | NO | NC | 1 | Relay 1 | Relay 2 | Relay 4 | 2 | 4 | NO | NC | NO | NC | NO | NC